# Altium PCB LED灯带-2835-30B-全限流-加定位点.PcbDoc (part 1 of 3)
Units mm, origin at the board's own origin, x right, y up, seen from the top; angles counter-clockwise.
Board outline 500 x 8 mm, 2 copper layers (Top Layer, Bottom Layer); 91 components, 0 nets, 184 pads, 0 vias.
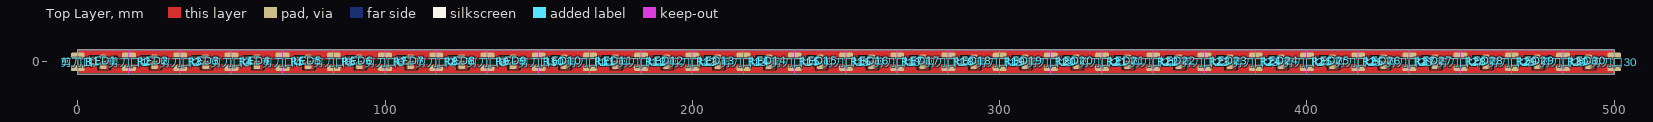
[diagram p0: Top Layer view]
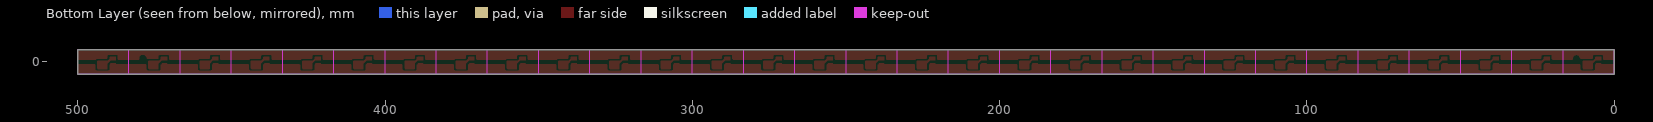
[diagram p1: Bottom Layer view, seen from below]

## Layer stack, top to bottom
Top Layer: signal copper 0.0356
Dielectric: dielectric 0.32, FR-4, Dk 4.8
Bottom Layer: signal copper 0.0356

## Board outline
0,4 500,4 500,-4 0,-4 0,4

## Design rules (kind name [scope] priority, off if disabled: settings)
Clearance [All] p1: gap=0.127
ComponentClearance [All] p1 off: gap=0.254 collisioncheckmode=3 verticalgap=0.254 showdistances=FALSE
PolygonConnect [All] p1 off: connectstyle=Relief reliefconductorwidth=0.254 reliefentries=4 polygonreliefangle="90 Angle"
RoutingVias [All] p1: holewidth=0.711 width=1.27 viastyle="Through Hole" minholewidth=0.711 minwidth=1.27 maxholewidth=0.711 maxwidth=1.27
SilkscreenOverComponentPads [All] p1: minsilkscreentomaskgap=0.254
SolderMaskExpansion [All] p1: expansion=0.102
Width [All] p1: maxlimit=254 minlimit=0.127 preferedwidth=0.254
26 further rules are at their usual default settings.

## Components (designator, comment, footprint, x,y, rotation, side; value= is the part's Value field where it differs from the comment)
LED1 "Comment" LED2835 8.333,0 r0 top
LED2 "Comment" LED2835 25,0 r0 top
LED3 "Comment" LED2835 41.667,0 r0 top
LED4 "Comment" LED2835 58.333,0 r0 top
LED5 "Comment" LED2835 75,0 r0 top
LED6 "Comment" LED2835 91.667,0 r0 top
LED7 "Comment" LED2835 108.333,0 r0 top
LED8 "Comment" LED2835 125,0 r0 top
LED9 "Comment" LED2835 141.667,0 r0 top
LED10 "Comment" LED2835 158.333,0 r0 top
LED11 "Comment" LED2835 175,0 r0 top
LED12 "Comment" LED2835 191.667,0 r0 top
LED13 "Comment" LED2835 208.333,0 r0 top
LED14 "Comment" LED2835 225,0 r0 top
LED15 "Comment" LED2835 241.667,0 r0 top
LED16 "Comment" LED2835 258.333,0 r0 top
LED17 "Comment" LED2835 275,0 r0 top
LED18 "Comment" LED2835 291.667,0 r0 top
LED19 "Comment" LED2835 308.333,0 r0 top
LED20 "Comment" LED2835 325,0 r0 top
LED21 "Comment" LED2835 341.667,0 r0 top
LED22 "Comment" LED2835 358.333,0 r0 top
LED23 "Comment" LED2835 375,0 r0 top
LED24 "Comment" LED2835 391.667,0 r0 top
LED25 "Comment" LED2835 408.333,0 r0 top
LED26 "Comment" LED2835 425,0 r0 top
LED27 "Comment" LED2835 441.667,0 r0 top
LED28 "Comment" LED2835 458.333,0 r0 top
LED29 "Comment" LED2835 475,0 r0 top
LED30 "Comment" LED2835 491.667,0 r0 top
R1 "Comment" R0805 5.08,0 r0 top
R2 "Comment" R0805 21.747,0 r0 top
R3 "Comment" R0805 38.413,0 r0 top
R4 "Comment" R0805 55.08,0 r0 top
R5 "Comment" R0805 71.747,0 r0 top
R6 "Comment" R0805 88.413,0 r0 top
R7 "Comment" R0805 105.08,0 r0 top
R8 "Comment" R0805 121.747,0 r0 top
R9 "Comment" R0805 138.413,0 r0 top
R10 "Comment" R0805 155.08,0 r0 top
R11 "Comment" R0805 171.747,0 r0 top
R12 "Comment" R0805 188.413,0 r0 top
R13 "Comment" R0805 205.08,0 r0 top
R14 "Comment" R0805 221.747,0 r0 top
R15 "Comment" R0805 238.413,0 r0 top
R16 "Comment" R0805 255.08,0 r0 top
R17 "Comment" R0805 271.747,0 r0 top
R18 "Comment" R0805 288.413,0 r0 top
R19 "Comment" R0805 305.08,0 r0 top
R20 "Comment" R0805 321.747,0 r0 top
R21 "Comment" R0805 338.413,0 r0 top
R22 "Comment" R0805 355.08,0 r0 top
R23 "Comment" R0805 371.747,0 r0 top
R24 "Comment" R0805 388.413,0 r0 top
R25 "Comment" R0805 405.08,0 r0 top
R26 "Comment" R0805 421.747,0 r0 top
R27 "Comment" R0805 438.413,0 r0 top
R28 "Comment" R0805 455.08,0 r0 top
R29 "Comment" R0805 471.747,0 r0 top
R30 "Comment" R0805 488.413,0 r0 top
剪刀口 "Comment" JIANDAOKOU 0,0 r180 top
剪刀口1 "Comment" JIANDAOKOU 16.667,0 r180 top
剪刀口2 "Comment" JIANDAOKOU 33.333,0 r180 top
剪刀口3 "Comment" JIANDAOKOU 50,0 r180 top
剪刀口4 "Comment" JIANDAOKOU 66.667,0 r180 top
剪刀口5 "Comment" JIANDAOKOU 83.333,0 r180 top
剪刀口6 "Comment" JIANDAOKOU 100,0 r180 top
剪刀口7 "Comment" JIANDAOKOU 116.667,0 r180 top
剪刀口8 "Comment" JIANDAOKOU 133.333,0 r180 top
剪刀口9 "Comment" JIANDAOKOU 150,0 r180 top
剪刀口10 "Comment" JIANDAOKOU 166.667,0 r180 top
剪刀口11 "Comment" JIANDAOKOU 183.333,0 r180 top
剪刀口12 "Comment" JIANDAOKOU 200,0 r180 top
剪刀口13 "Comment" JIANDAOKOU 216.667,0 r180 top
剪刀口14 "Comment" JIANDAOKOU 233.333,0 r180 top
剪刀口15 "Comment" JIANDAOKOU 250,0 r180 top
剪刀口16 "Comment" JIANDAOKOU 266.667,0 r180 top
剪刀口17 "Comment" JIANDAOKOU 283.333,0 r180 top
剪刀口18 "Comment" JIANDAOKOU 300,0 r180 top
剪刀口19 "Comment" JIANDAOKOU 316.667,0 r180 top
剪刀口20 "Comment" JIANDAOKOU 333.333,0 r180 top
剪刀口21 "Comment" JIANDAOKOU 350,0 r180 top
剪刀口22 "Comment" JIANDAOKOU 366.667,0 r180 top
剪刀口23 "Comment" JIANDAOKOU 383.333,0 r180 top
剪刀口24 "Comment" JIANDAOKOU 400,0 r180 top
剪刀口25 "Comment" JIANDAOKOU 416.667,0 r180 top
剪刀口26 "Comment" JIANDAOKOU 433.333,0 r180 top
剪刀口27 "Comment" JIANDAOKOU 450,0 r180 top
剪刀口28 "Comment" JIANDAOKOU 466.667,0 r180 top
剪刀口29 "Comment" JIANDAOKOU 483.333,0 r180 top
剪刀口30 "Comment" JIANDAOKOU 500,0 r180 top

## Footprints (in the part's own frame and the unit in brackets; to place one, negate y for a bottom-side part, rotate by r counter-clockwise, add the part's x,y. Pads: shape width x height; smd on the part's side, far side on the other; paste and mask are expansions set on the pad)
JIANDAOKOU [mm]
  rrect50% 4.5x2 smd: 1(0,2) 2(0,-2)
LED2835 [mm]
  rrect50% 2.1x1.19 smd: 1(0,1.725)
  rrect50% 2.1x2.65 smd: 2(0,-0.995)
R0805 [mm]
  rrect50% 1.25x1.125 smd: 1(0,1.062) 2(0,-1.062)

## Free pads (board coordinates)
  round 1.1 smd mask+0.45: 0(12.319,1.016) 0(478.79,1.143)

## Nets (pads, with @x,y where several pads share a name; then routed paths per layer and width w, separated by ;. In a path a pad name is that pad's centre, name@x,y a point inside that pad or via, vN(x,y) a via of type N, cw(c..) or ccw(c..) an arc to the next point about the centre after c; other vN are vias at no path point)
pads on no net: LED1.1 LED1.2 LED2.1 LED2.2 LED3.1 LED3.2 LED4.1 LED4.2 LED5.1 LED5.2 LED6.1 LED6.2 LED7.1 LED7.2 LED8.1 LED8.2 LED9.1 LED9.2 LED10.1 LED10.2 LED11.1 LED11.2 LED12.1 LED12.2 LED13.1 LED13.2 LED14.1 LED14.2 LED15.1 LED15.2 LED16.1 LED16.2 LED17.1 LED17.2 LED18.1 LED18.2 LED19.1 LED19.2 LED20.1 LED20.2 LED21.1 LED21.2 LED22.1 LED22.2 LED23.1 LED23.2 LED24.1 LED24.2 LED25.1 LED25.2 LED26.1 LED26.2 LED27.1 LED27.2 LED28.1 LED28.2 LED29.1 LED29.2 LED30.1 LED30.2 R1.1 R1.2 R2.1 R2.2 R3.1 R3.2 R4.1 R4.2 R5.1 R5.2 R6.1 R6.2 R7.1 R7.2 R8.1 R8.2 R9.1 R9.2 R10.1 R10.2 R11.1 R11.2 R12.1 R12.2 R13.1 R13.2 R14.1 R14.2 R15.1 R15.2 R16.1 R16.2 R17.1 R17.2 R18.1 R18.2 R19.1 R19.2 R20.1 R20.2 R21.1 R21.2 R22.1 R22.2 R23.1 R23.2 R24.1 R24.2 R25.1 R25.2 R26.1 R26.2 R27.1 R27.2 R28.1 R28.2 R29.1 R29.2 R30.1 R30.2 剪刀口1.1 剪刀口1.2 剪刀口2.1 剪刀口2.2 剪刀口3.1 剪刀口3.2 剪刀口4.1 剪刀口4.2 剪刀口5.1 剪刀口5.2 剪刀口6.1 剪刀口6.2 剪刀口7.1 剪刀口7.2 剪刀口8.1 剪刀口8.2 剪刀口9.1 剪刀口9.2 剪刀口10.1 剪刀口10.2 剪刀口11.1 剪刀口11.2 剪刀口12.1 剪刀口12.2 剪刀口13.1 剪刀口13.2 剪刀口14.1 剪刀口14.2 剪刀口15.1 剪刀口15.2 剪刀口16.1 剪刀口16.2 剪刀口17.1 剪刀口17.2 剪刀口18.1 剪刀口18.2 剪刀口19.1 剪刀口19.2 剪刀口20.1 剪刀口20.2 剪刀口21.1 剪刀口21.2 剪刀口22.1 剪刀口22.2 剪刀口23.1 剪刀口23.2 剪刀口24.1 剪刀口24.2 剪刀口25.1 剪刀口25.2 剪刀口26.1 剪刀口26.2 剪刀口27.1 剪刀口27.2 剪刀口28.1 剪刀口28.2 剪刀口29.1 剪刀口29.2 剪刀口30.1 剪刀口30.2 剪刀口.1 剪刀口.2
copper on no net: | length 8.8
  Top Layer w0.5: 10.939,1.267 cw(c12.319,1.016) 13.716,0.886 ; 477.393,1.27 cw(c478.79,1.143) 480.169,0.889

## Keep-outs
Keep-Out Layer:
  lines w0.254: 16.667,-4 16.667,4 ; 33.333,-4 33.333,4 ; 50,-4 50,4 ; 66.667,-4 66.667,4 ; 83.333,-4 83.333,4 ; 100,-4 100,4 ; 116.667,-4 116.667,4 ; 133.333,-4 133.333,4 ; 150,-4 150,4 ; 166.667,-4 166.667,4 ; 183.333,-4 183.333,4 ; 200,-4 200,4 ; 216.667,-4 216.667,4 ; 233.333,-4 233.333,4 ; 250,-4 250,4 ; 266.667,-4 266.667,4 ; 283.333,-4 283.333,4 ; 300,-4 300,4 ; 316.667,-4 316.667,4 ; 333.333,-4 333.333,4 ; 350,-4 350,4 ; 366.667,-4 366.667,4 ; 383.333,-4 383.333,4 ; 400,-4 400,4 ; 416.667,-4 416.667,4 ; 433.333,-4 433.333,4 ; 450,-4 450,4 ; 466.667,-4 466.667,4 ; 483.333,-4 483.333,4 ; 0,-4 500,-4 500,4 0,4 0,-4